# EAGLE board schematic (EAGLE 9.6.2)
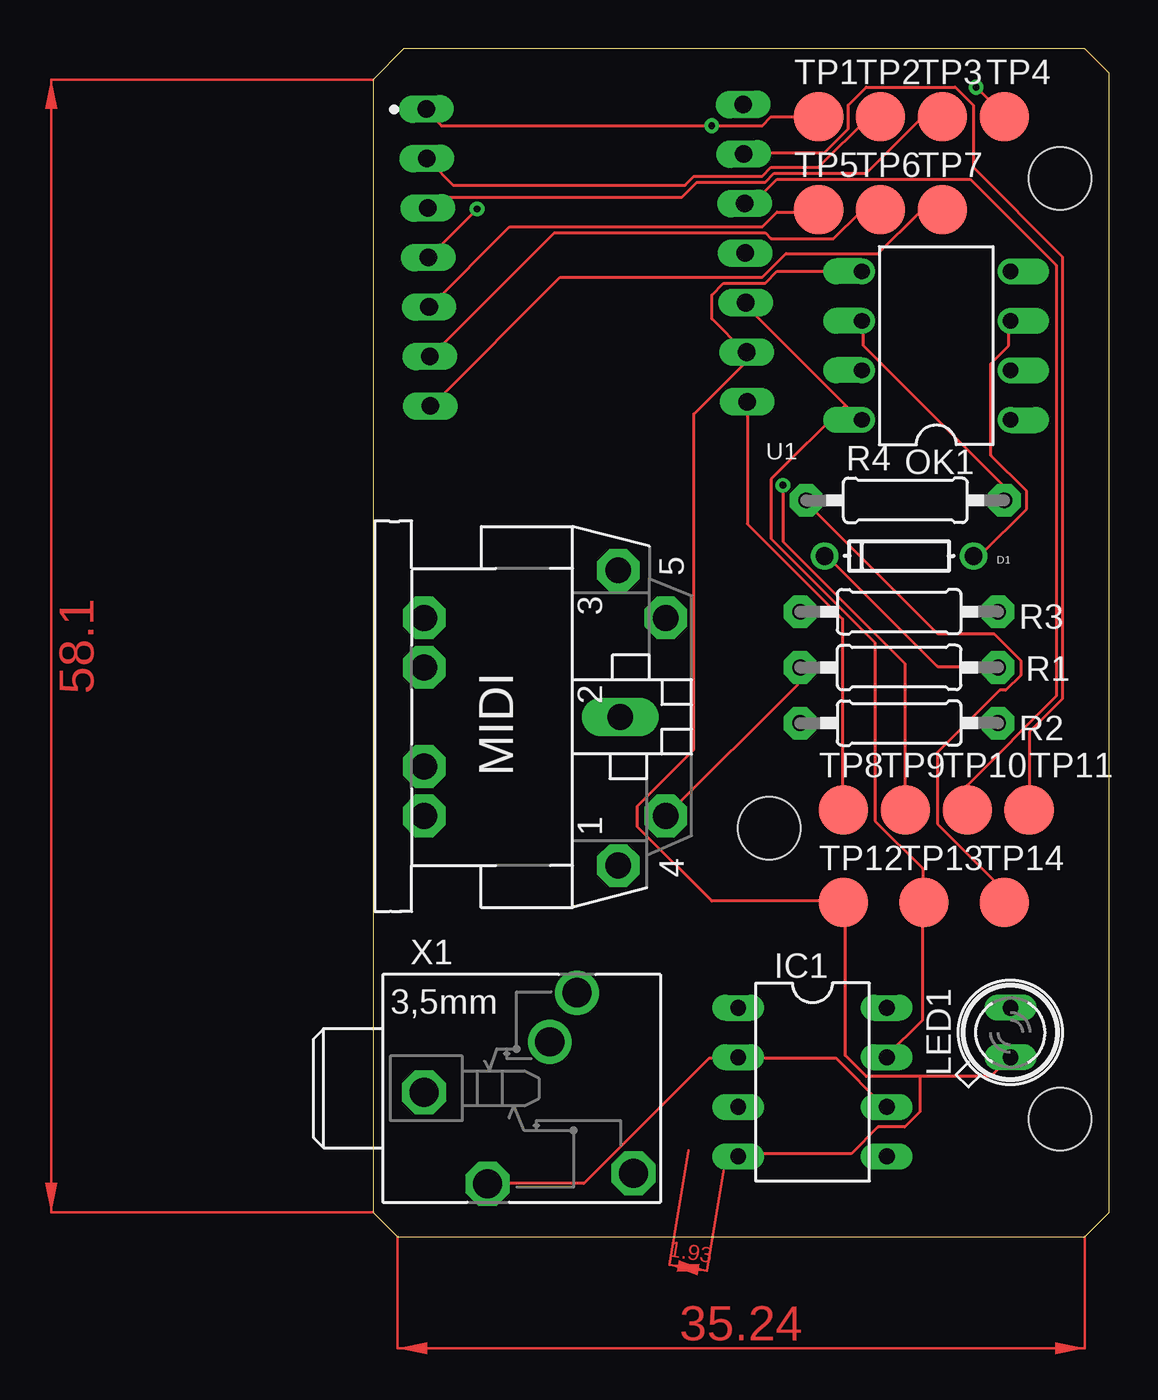
[diagram p0: board, top side]
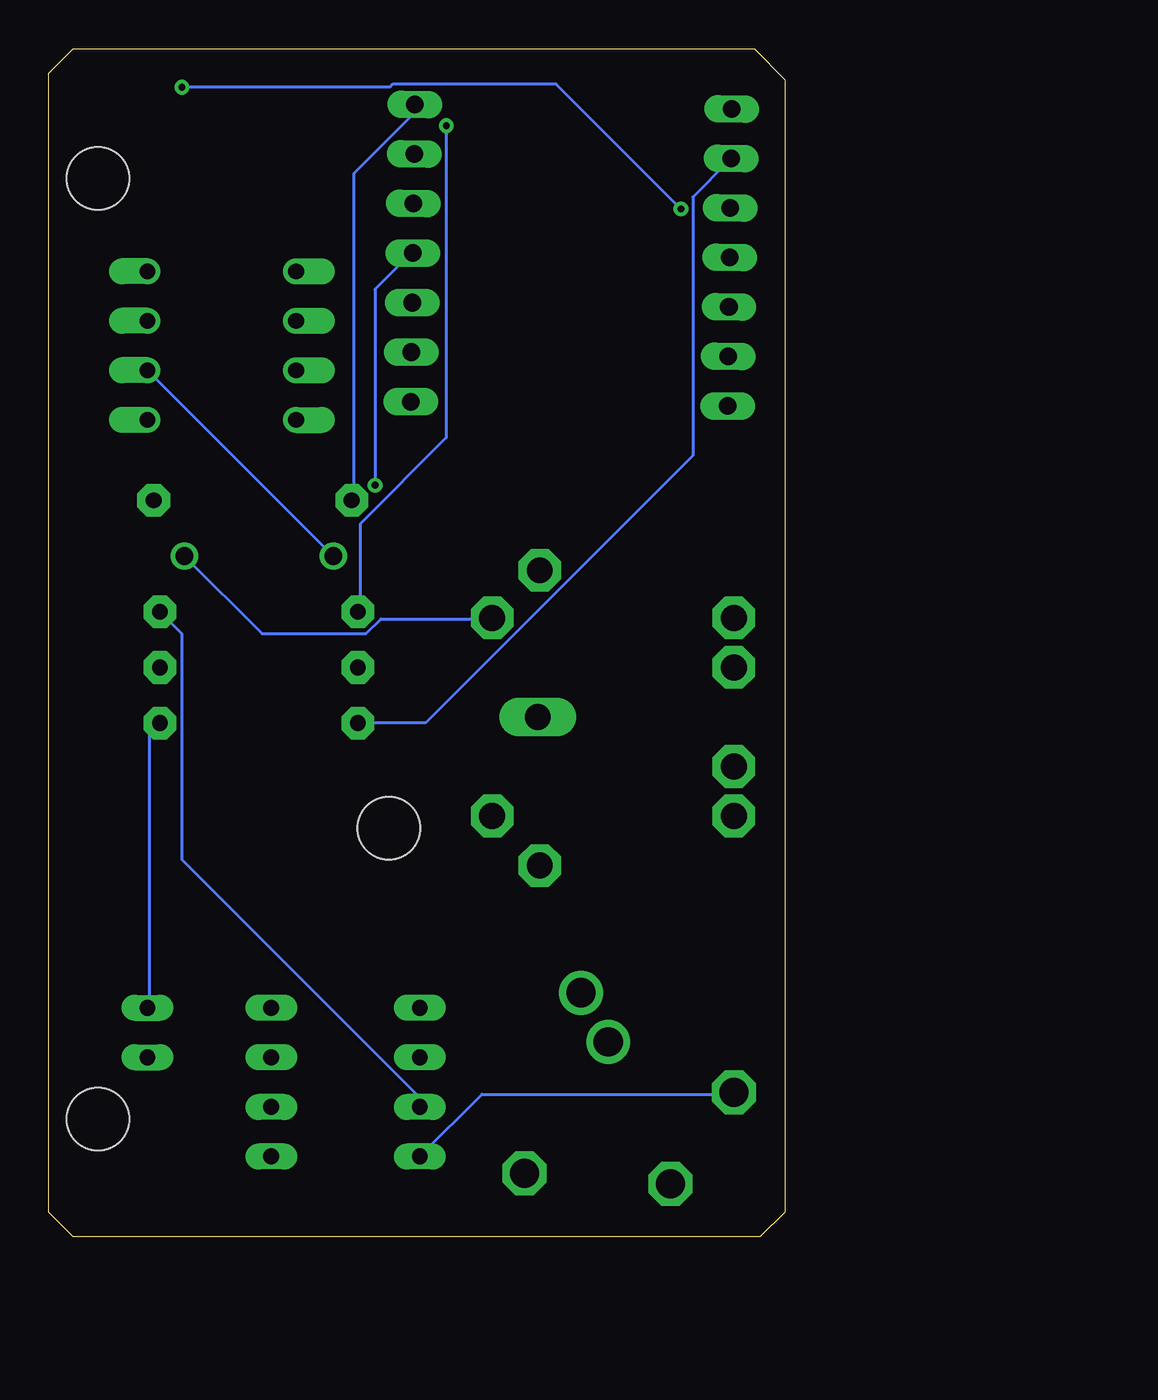
[diagram p1: board, bottom side, seen from below]

Size 37.77 x 60.95 mm. Coordinates in mm from the lower left corner, seen from the top.
Outline: 36.52,60.95 1.58,60.95 0,59.37 0,1.27 1.27,0 36.51,0 37.77,1.26 37.77,59.7 36.52,60.95
Copper layers (1*16): Top 0.035mm / dielectric 1.5mm / Bottom 0.035mm
Design rules "default": minimum track width 6mil, minimum drill 0.35mm, track to track 6mil, track to pad 6mil, pad to pad 6mil, via to via 6mil, smd to smd 6mil, copper to edge 40mil, drill to drill 6mil, minimum pad ring 10mil, minimum via ring 8mil, stop-mask expansion 4mil, vias tented up to drill 0mil, thermal gap 10mil
Holes 3.2 mm at 35.24,6.03 35.24,54.29 20.32,20.95

## Footprints (pad centres in the part's own frame; a part is rotated, then mirrored left to right if it is on the bottom)
DO-1N4148 = drill 0.9: A -3.81,0; C 3.81,0
DIL08 = drill 0.813 long: 1 -3.81,-3.81; 2 -1.27,-3.81; 3 1.27,-3.81; 4 3.81,-3.81; 5 3.81,3.81; 6 1.27,3.81; 7 -1.27,3.81; 8 -3.81,3.81
SFH480 = drill 0.813 long: A 1.27,0; K -1.27,0
CP-2350 = drill 1.321 pad 2.184 octagon: 1 7.62,12.58; 3 -7.52,12.58; 4 5.08,15.02; 5 -5.08,15.02; PE -2.54,2.62; PE1 -5.08,2.62; PE2 5.08,2.62; PE@ 2.54,2.62 | drill 1.321 long: 2 0,12.68
DIL08' = drill 0.813 offset: 1 -3.81,-3.81; 2 -1.27,-3.81; 3 1.27,-3.81; 4 3.81,-3.81; 5 3.81,3.81; 6 1.27,3.81; 7 -1.27,3.81; 8 -3.81,3.81
0207/10 = drill 0.813 pad 1.676 octagon: 1 -5.08,0; 2 5.08,0
B2,54 = smd 2.54 x 2.54: TP 0,0
MOUDLE14P-2.54-21X17.8MM = drill 0.9 long: PAD0 0.762,18.161; PAD1 0.762,15.621; PAD2 0.762,13.081; PAD3 0.762,10.541; PAD4 0.762,8.001; PAD5 0.762,5.461; PAD6 0.762,2.921; PAD14 17.018,18.161; PAD15 17.018,15.621; PAD16 17.018,13.081; PAD17 17.018,10.541; PAD18 17.018,8.001; PAD19 17.018,5.461; PAD20 17.018,2.921
PG203J = drill 1.499 octagon: 1 -5.004,-0.203; 4 5.74,-4.369; 5 -1.753,-4.902 | drill 1.499: 2 2.845,4.902; 3 1.448,2.388

## Placement (x,y rotation side)
D1  [DO-1N4148]  26.99,34.92 180 top
IC1  TL071P  [DIL08]  22.54,7.94 270 top
LED1  [SFH480]  32.7,10.48 90 top
MIDI  MIDIJACK  [CP-2350]  0,26.67 270 top
OK1  6N138  [DIL08']  28.89,45.72 90 top
R1  220  [0207/10]  26.99,29.21 0 top
R2  100  [0207/10]  26.99,26.35 180 top
R3  1k  [0207/10]  26.99,32.07 180 top
R4  270  [0207/10]  27.3,37.78 0 top
TP1  TPB2,54  [B2,54]  22.86,57.47 0 top
TP2  TPB2,54  [B2,54]  26.04,57.47 0 top
TP3  TPB2,54  [B2,54]  29.21,57.47 0 top
TP4  TPB2,54  [B2,54]  32.38,57.47 0 top
TP5  TPB2,54  [B2,54]  22.86,52.7 0 top
TP6  TPB2,54  [B2,54]  26.04,52.7 0 top
TP7  TPB2,54  [B2,54]  29.21,52.7 0 top
TP8  TPB2,54  [B2,54]  24.13,21.91 0 top
TP9  TPB2,54  [B2,54]  27.3,21.91 0 top
TP10  TPB2,54  [B2,54]  30.48,21.91 0 top
TP11  TPB2,54  [B2,54]  33.66,21.91 0 top
TP12  TPB2,54  [B2,54]  24.13,17.14 0 top
TP13  TPB2,54  [B2,54]  28.26,17.14 0 top
TP14  TPB2,54  [B2,54]  32.38,17.14 0 top
U1  [MOUDLE14P-2.54-21X17.8MM]  2.22,39.69 0.8 top
X1  PG203J  [PG203J]  7.62,7.62 0 top

## Library data of the parts
D1 LED1 MIDI R1-R4 = adafruit
IC1 = linear3
OK1 = optocoupler; MF: VISHAY/TELEFUNKEN; MPN: 6N138; OC_FARNELL: 9860150; OC_NEWARK: 35K5294
TP1-TP14 = testpad
U1 = Seeeduino XIAO_holes
X1 = con-hirschmann; OC_FARNELL: unknown; OC_NEWARK: unknown

## Nets
N$1: D1.C OK1.2 R1.2
N$2: MIDI.4 R1.1
N$3: D1.A MIDI.5 OK1.3
N$4: TP3.TP U1.PAD2
N$5: IC1.7 OK1.8 TP13.TP U1.PAD18
N$6: R4.1 TP14.TP U1.PAD14
N$7: TP4.TP U1.PAD3
N$8: R3.2 TP1.TP U1.PAD0
N$9: TP5.TP U1.PAD4
N$10: IC1.3 R3.1
N$11: IC1.2 IC1.6 X1.5
N$12: TP6.TP U1.PAD5
N$13: TP7.TP U1.PAD6
N$14: LED1.A R2.1
N$15: IC1.4 LED1.K OK1.5 TP12.TP U1.PAD19 X1.1
N$16: R2.2 TP2.TP U1.PAD1
N$17: TP8.TP U1.PAD20
N$18: TP9.TP U1.PAD17
N$19: TP10.TP U1.PAD16
N$20: TP11.TP U1.PAD15
N$21: OK1.6 R4.2

## Tracks (layer width: path | path; a pad name or v marks a point on that pad's centre or on a via)
N$1
  Top 0.152: R1.2 32,29.26 28.96,29.26 23.32,34.9 D1.C
  Bottom 0.152: OK1.2 32.61,44.35 23.32,35.05 D1.C
N$2
  Top 0.152: R1.1 21.79,29.11 21.79,28.35 15.09,21.64 MIDI.4
N$3
  Top 0.152: OK1.3 32.61,46.94 32.61,45.72 31.7,44.81 31.7,40.08 33.53,38.25 33.53,37.34 31.24,35.05 30.94,35.05 D1.A
  Bottom 0.152: MIDI.5 15.09,31.7 20.73,31.7 21.49,30.94 26.82,30.94 30.79,34.9 D1.A
N$4
  Top 0.152: TP3.TP 29.11,57.45 28.19,57.45 25.3,54.56 20.57,54.56 20.12,54.1 16.61,54.1 15.85,53.34 3.35,53.34 2.9,52.88 U1.PAD2
N$5
  Top 0.152: IC1.7 26.36,9.3 28.19,11.12 28.19,17.07 TP13.TP 28.19,17.22 28.19,18.9 25.76,21.34 25.76,30.48 20.42,35.81 20.42,38.86 24.23,42.67 | 24.23,42.67 19.05,47.85 U1.PAD18 | 24.23,42.67 24.99,41.91 OK1.8
N$6
  Top 0.152: TP14.TP 32.31,17.22 32.31,17.83 28.96,21.18 28.96,24.84 32.16,28.04 32.46,28.04 33.22,28.8 33.22,29.57 31.85,30.94 28.96,30.94 22.25,37.64 R4.1
  Bottom 0.152: U1.PAD14 19.05,58.06 19.05,57.61 22.1,54.56 22.1,37.79 R4.1
N$7  (via drill 0.35)
  Top 0.152: v30.94,58.98 32.31,57.61 TP4.TP | v5.33,52.73 2.9,50.29 U1.PAD3
  Bottom 0.152: v30.94,58.98 20.27,58.98 20.12,59.13 11.73,59.13 v5.33,52.73
N$8  (via drill 0.35)
  Top 0.152: TP1.TP 22.86,57.45 20.42,57.45 19.96,57 v17.37,57 3.5,57 2.74,57.76 U1.PAD0
  Bottom 0.152: v17.37,57 17.37,41 21.79,36.58 21.79,32.16 R3.2
N$9
  Top 0.152: TP5.TP 22.86,52.58 20.73,52.58 19.96,51.82 7.01,51.82 2.9,47.7 U1.PAD4
N$10
  Bottom 0.152: R3.1 30.94,30.94 30.94,19.35 18.75,7.16 18.75,6.71 IC1.3
N$11
  Top 0.152: IC1.6 26.21,6.71 23.77,9.14 18.75,9.14 IC1.2 18.59,9.14 17.22,9.14 10.82,2.74 5.94,2.74 X1.5
N$12
  Top 0.152: TP6.TP 25.91,52.58 24.99,52.58 23.62,51.21 20.42,51.21 20.12,51.51 9.3,51.51 3.05,45.26 U1.PAD5
N$13
  Top 0.152: TP7.TP 29.11,52.58 28.04,52.58 25.91,50.44 21.18,50.44 19.96,49.23 9.6,49.23 3.05,42.67 U1.PAD6
N$14
  Bottom 0.152: LED1.A 32.61,11.89 32.61,25.76 32.16,26.21 R2.1
N$15
  Top 0.152: OK1.5 20.73,49.53 20.12,48.92 17.98,48.92 17.37,48.31 17.37,47.09 19.05,45.41 U1.PAD19 19.05,45.26 19.05,44.81 16.46,42.21 16.46,24.99 13.56,22.1 13.56,21.03 17.37,17.22 24.08,17.22 TP12.TP 24.23,17.07 24.23,9.3 25.3,8.23 28.04,8.23 | 28.04,8.23 31.7,8.23 32.61,9.14 LED1.K | 28.04,8.23 28.04,6.4 27.28,5.64 25.91,5.64 24.54,4.27 18.75,4.27 IC1.4
  Bottom 0.152: IC1.4 15.54,7.31 2.74,7.31 X1.1
N$16
  Top 0.152: TP2.TP 25.91,57.45 25.45,57.45 22.86,54.86 20.42,54.86 19.96,54.41 16.46,54.41 16,53.95 4.12,53.95 2.9,55.17 U1.PAD1
  Bottom 0.152: R2.2 21.79,26.36 18.44,26.36 4.72,40.08 4.72,53.34 2.9,55.17 U1.PAD1
N$17
  Top 0.152: TP8.TP 24.08,21.95 24.08,31.7 19.2,36.58 19.2,42.82 U1.PAD20
N$18  (via drill 0.35)
  Top 0.152: v21.03,38.56 21.03,35.66 27.28,29.41 27.28,21.95 TP9.TP
  Bottom 0.152: v21.03,38.56 21.03,48.62 19.2,50.44 U1.PAD17
N$19
  Top 0.152: TP10.TP 30.48,23.16 35.05,27.74 35.05,49.84 30.63,54.25 20.73,54.25 19.51,53.04 19.2,53.04 U1.PAD16
N$20
  Top 0.152: TP11.TP 33.68,21.95 33.68,25.91 35.36,27.58 35.36,50.29 30.79,54.86 30.79,58.06 29.87,58.98 25.3,58.98 24.38,58.06 24.38,56.84 23.16,55.63 19.05,55.63 U1.PAD15
N$21
  Top 0.152: OK1.6 25.15,46.94 25.15,45.72 32.31,38.56 32.31,37.79 R4.2
(copper drawn outside any net)
  shapes: Top area x3

## Text on the board
tValues: Designed by T. Findlay, v1.4